# Altium PCB RGB_Matrix.PcbDoc
Units mm, origin at the board's own origin, x right, y up, seen from the top; angles counter-clockwise.
Board outline 152.4 x 101.6 mm, 2 copper layers (Top Layer, Bottom Layer); 83 components, 50 nets, 482 pads, 108 vias.
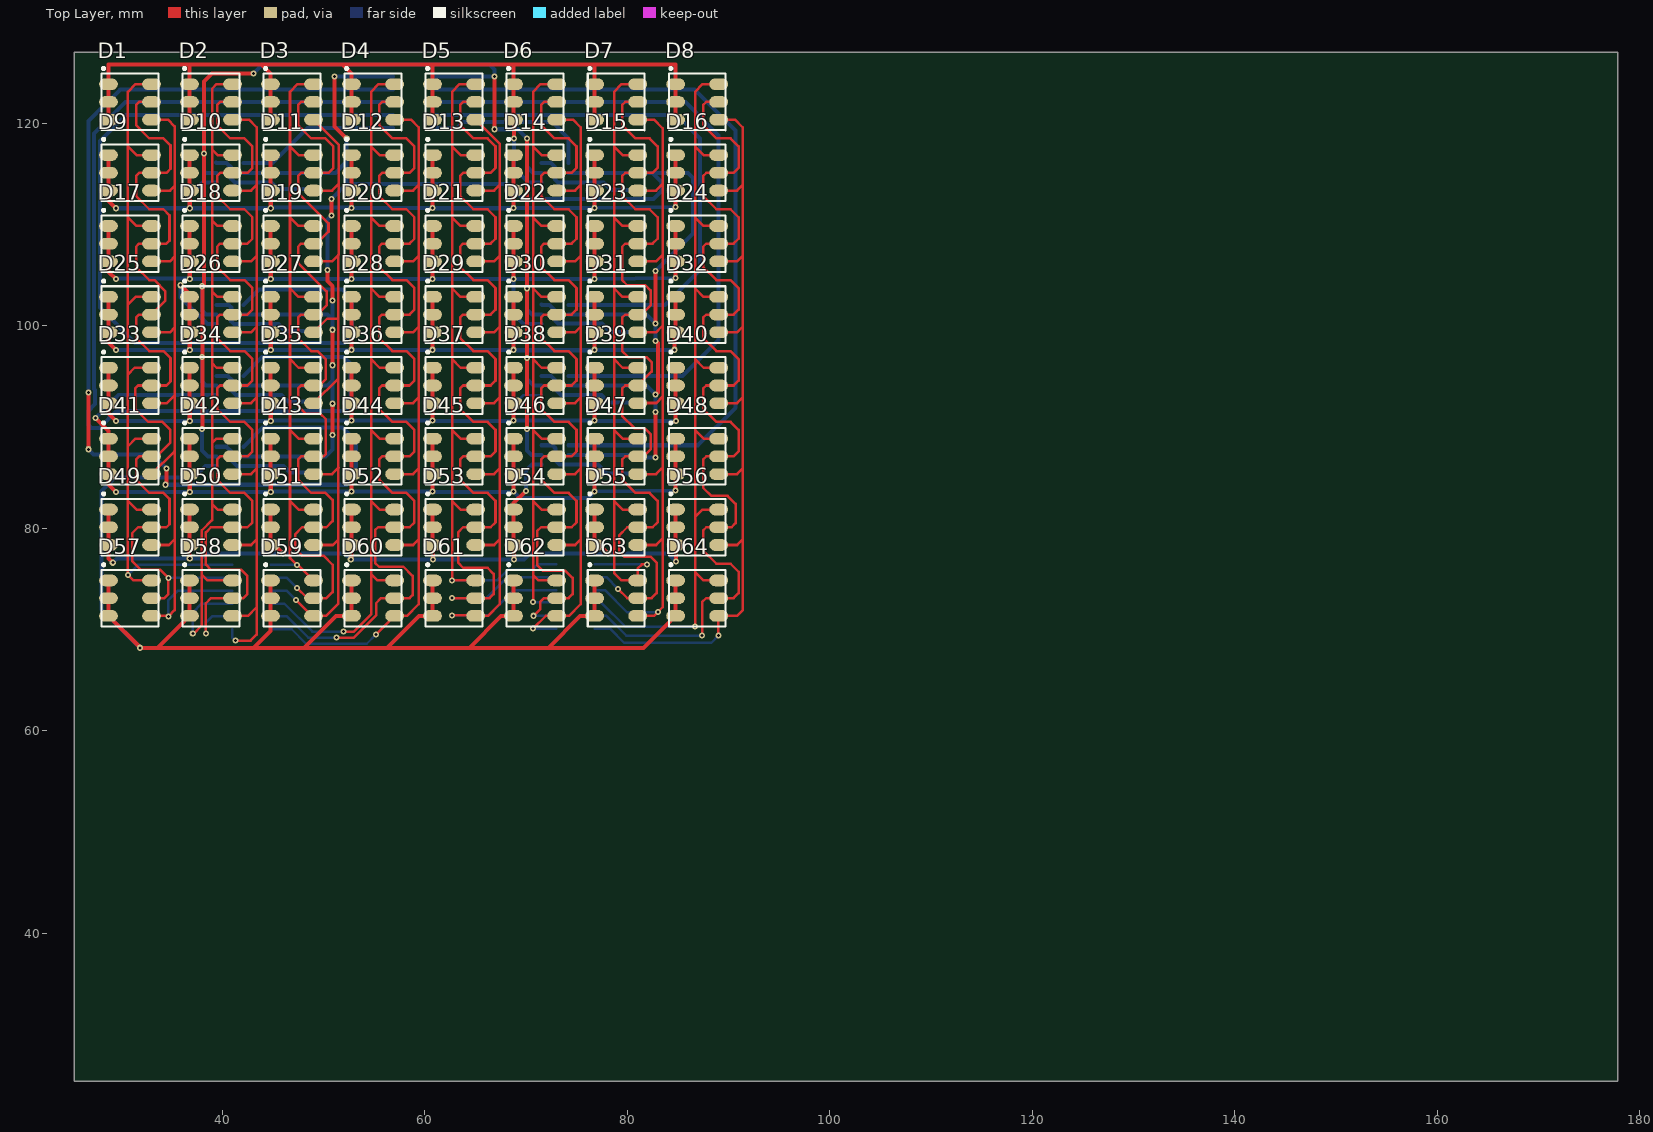
[diagram p0: Top Layer view]
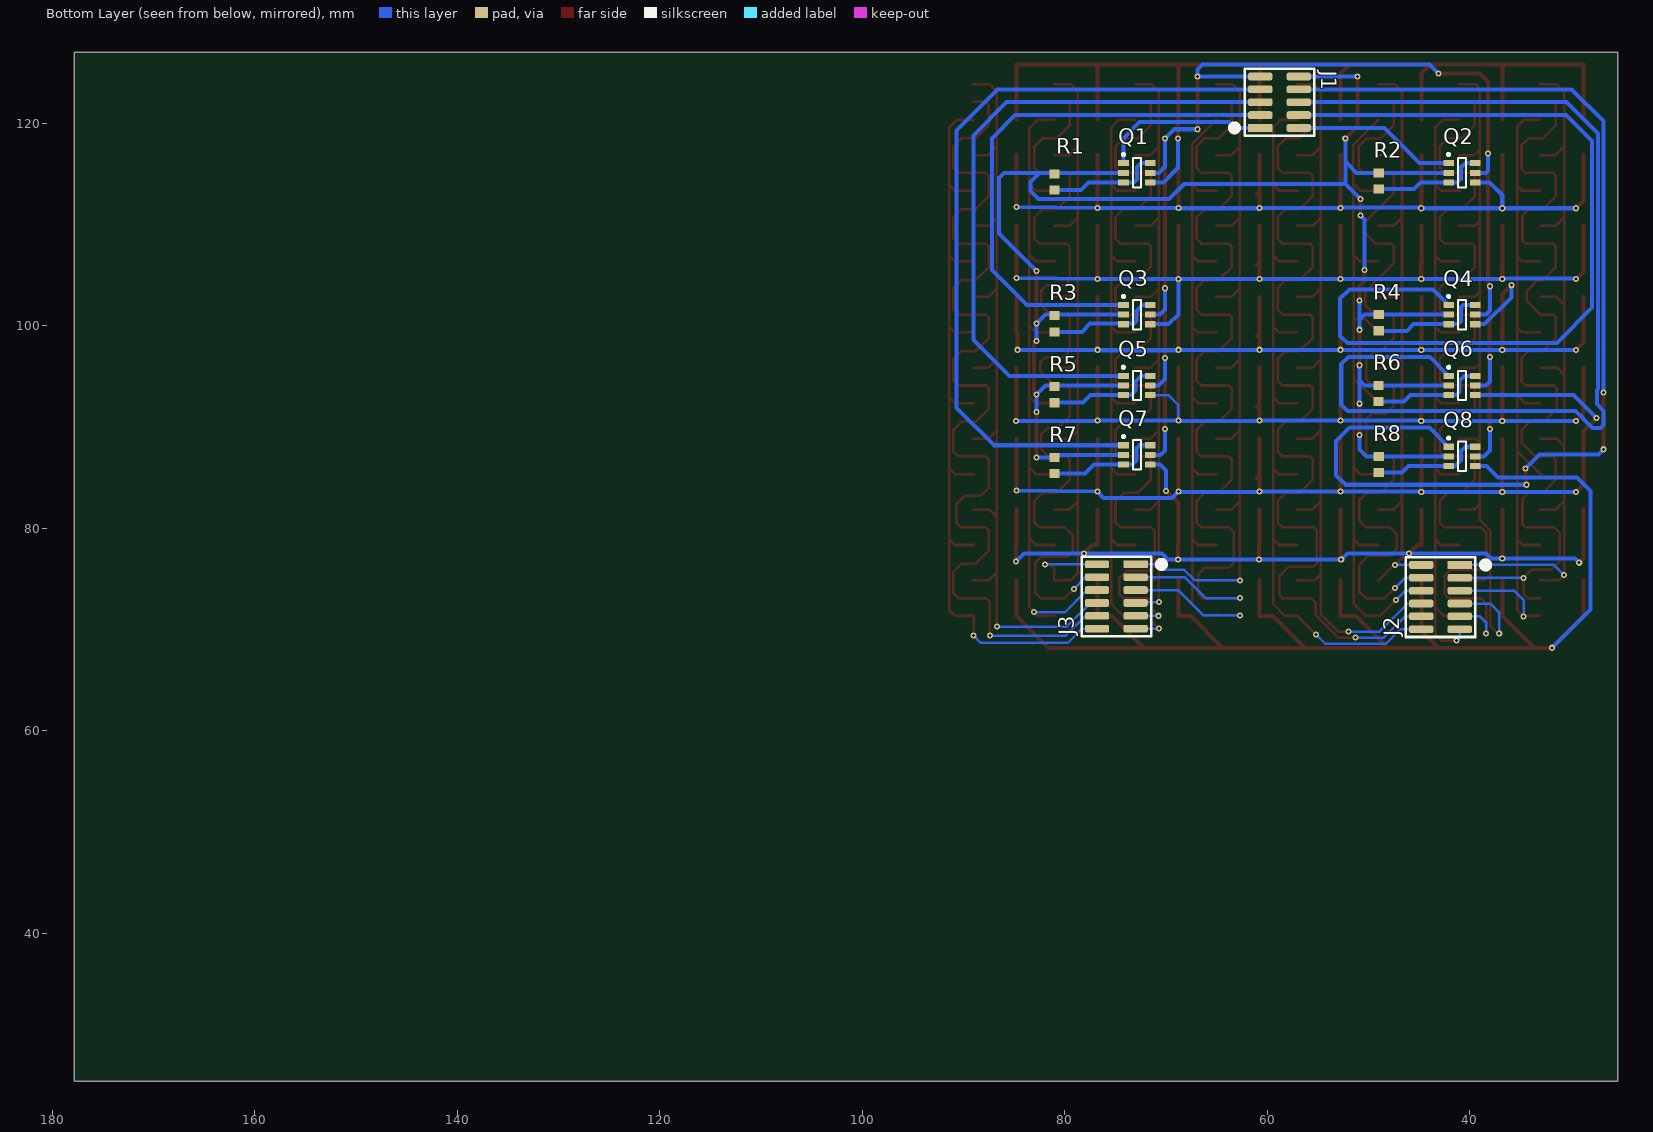
[diagram p1: Bottom Layer view, seen from below]
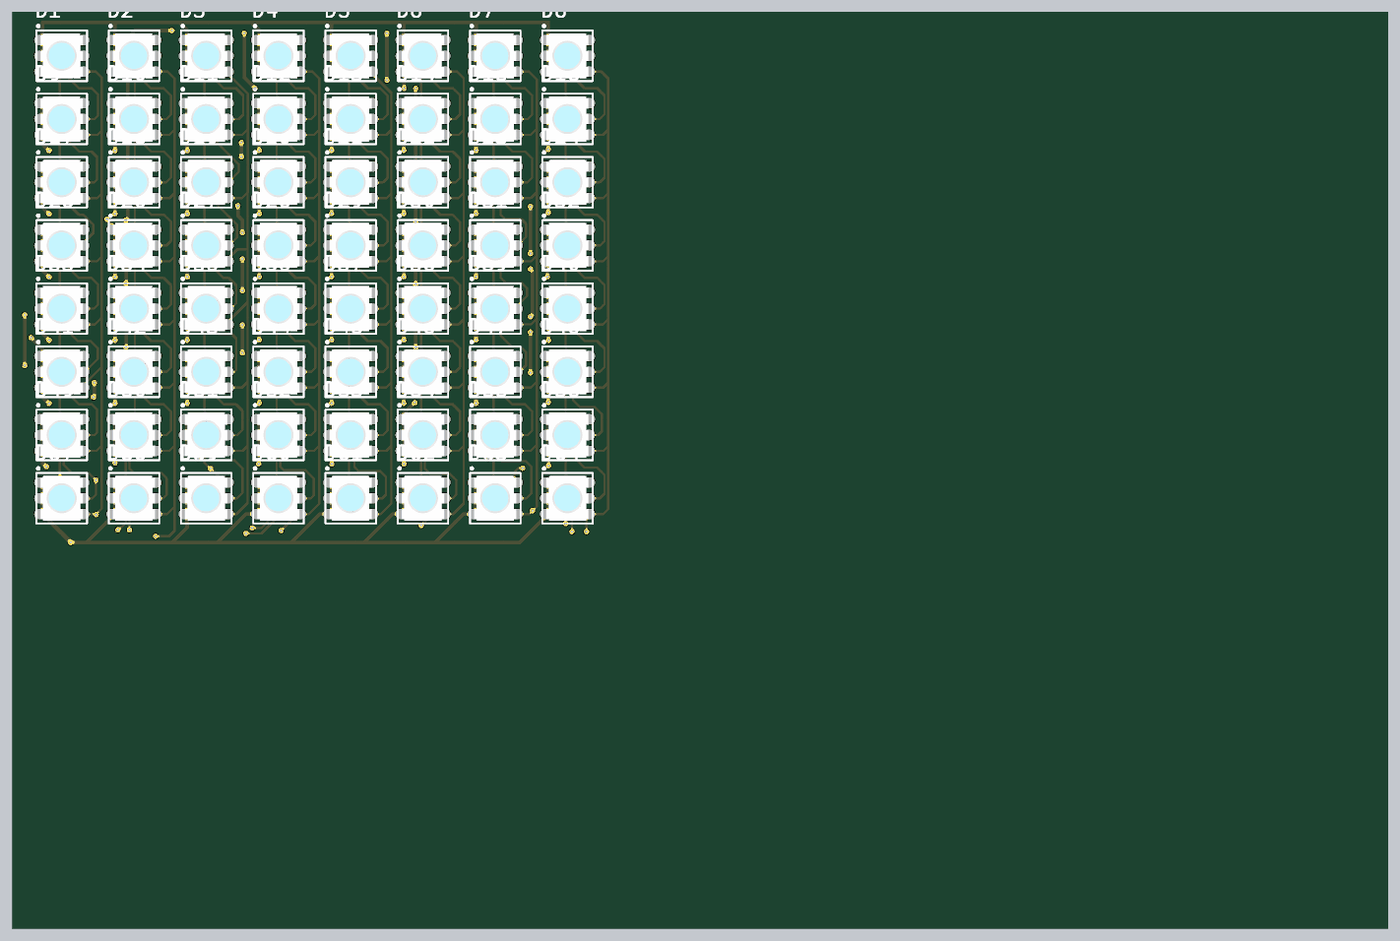
[diagram p2: 3D render of the assembled board from above, using the file's embedded part models]

## Layer stack, top to bottom
Top Solder: solder mask 0.0102, Solder Resist, Dk 3.5
Top Layer: signal copper 0.0356
Dielectric 1: dielectric 0.32, FR-4, Dk 4.8
Bottom Layer: signal copper 0.0356
Bottom Solder: solder mask 0.0102, Solder Resist, Dk 3.5

## Board outline
25.4,25.4 177.8,25.4 177.8,127 25.4,127

## Design rules (kind name [scope] priority, off if disabled: settings)
Clearance [All] p1: gap=0.16 ignorepadtopadclearanceinfootprint=FALSE except(0: Arc-Text Arc-Hole Track-Text Track-Hole SMDPad-Text SMDPad-Hole THPad-Text THPad-Hole Via-Text Via-Hole Fill-Text Fill-Hole Poly-Text Poly-Hole Region-Text Region-Hole Text-Text Text-Hole; 0.305: Via-Via Via-Fill Via-Poly Via-Region)
Height [All] p1: minheight=0 maxheight=200 prefheight=12.7
HoleSize [All] p1: absolutevalues=TRUE maxlimit=6.35 minlimit=0.3 maxpercent=80.000 minpercent=20.000
MinimumSolderMaskSliver [All] p1: minsoldermaskwidth=0.1
PlaneClearance [All] p1: clearance=1
PlaneConnect [All] p1: planeconnectstyle=Relief reliefexpansion=0.508 reliefentries=4 reliefconductorwidth=1 reliefairgap=0.254
PolygonConnect PolygonConnect_1 [IsVia] p1: connectstyle=Direct reliefconductorwidth=0.254 reliefentries=4 polygonreliefangle="90 Angle" airgapwidth=0.254
PolygonConnect [All] p2: connectstyle=Relief reliefconductorwidth=0.2 reliefentries=4 polygonreliefangle="90 Angle" airgapwidth=0.2
RoutingVias [All] p1: holewidth=0.3 width=0.6 viastyle="Through Hole" minholewidth=0.3 minwidth=0.6 maxholewidth=6.35 maxwidth=10 useviatemplates=TRUE viatemplateguid#1={2E2191CD-4772-4E32-9354-9200DD199FA9} viatemplatename#1=v60h30
SilkToSolderMaskClearance [IsPad] p1: minsilkscreentomaskgap=0.178 clearancetoexposedcopper=TRUE
SolderMaskExpansion [All] p1: expansion=0.102
Width [All] p1: maxlimit=10 minlimit=0.16 preferedwidth=0.4
24 further rules are at their usual default settings.

## Components (designator, comment, footprint, x,y, rotation, side; value= is the part's Value field where it differs from the comment)
D1 "LED_RGB" LED5050_RGB_N 30.9,122.1 r0 top
D2 "LED_RGB" LED5050_RGB_N 38.9,122.1 r0 top
D3 "LED_RGB" LED5050_RGB_N 46.9,122.1 r0 top
D4 "LED_RGB" LED5050_RGB_N 54.9,122.1 r0 top
D5 "LED_RGB" LED5050_RGB_N 62.9,122.1 r0 top
D6 "LED_RGB" LED5050_RGB_N 70.9,122.1 r0 top
D7 "LED_RGB" LED5050_RGB_N 78.9,122.1 r0 top
D8 "LED_RGB" LED5050_RGB_N 86.9,122.1 r0 top
D9 "LED_RGB" LED5050_RGB_N 30.9,115.1 r0 top
D10 "LED_RGB" LED5050_RGB_N 38.9,115.1 r0 top
D11 "LED_RGB" LED5050_RGB_N 46.9,115.1 r0 top
D12 "LED_RGB" LED5050_RGB_N 54.9,115.1 r0 top
D13 "LED_RGB" LED5050_RGB_N 62.9,115.1 r0 top
D14 "LED_RGB" LED5050_RGB_N 70.9,115.1 r0 top
D15 "LED_RGB" LED5050_RGB_N 78.9,115.1 r0 top
D16 "LED_RGB" LED5050_RGB_N 86.9,115.1 r0 top
D17 "LED_RGB" LED5050_RGB_N 30.9,108.1 r0 top
D18 "LED_RGB" LED5050_RGB_N 38.9,108.1 r0 top
D19 "LED_RGB" LED5050_RGB_N 46.9,108.1 r0 top
D20 "LED_RGB" LED5050_RGB_N 54.9,108.1 r0 top
D21 "LED_RGB" LED5050_RGB_N 62.9,108.1 r0 top
D22 "LED_RGB" LED5050_RGB_N 70.9,108.1 r0 top
D23 "LED_RGB" LED5050_RGB_N 78.9,108.1 r0 top
D24 "LED_RGB" LED5050_RGB_N 86.9,108.1 r0 top
D25 "LED_RGB" LED5050_RGB_N 30.9,101.1 r0 top
D26 "LED_RGB" LED5050_RGB_N 38.9,101.1 r0 top
D27 "LED_RGB" LED5050_RGB_N 46.9,101.1 r0 top
D28 "LED_RGB" LED5050_RGB_N 54.9,101.1 r0 top
D29 "LED_RGB" LED5050_RGB_N 62.9,101.1 r0 top
D30 "LED_RGB" LED5050_RGB_N 70.9,101.1 r0 top
D31 "LED_RGB" LED5050_RGB_N 78.9,101.1 r0 top
D32 "LED_RGB" LED5050_RGB_N 86.9,101.1 r0 top
D33 "LED_RGB" LED5050_RGB_N 30.9,94.1 r0 top
D34 "LED_RGB" LED5050_RGB_N 38.9,94.1 r0 top
D35 "LED_RGB" LED5050_RGB_N 46.9,94.1 r0 top
D36 "LED_RGB" LED5050_RGB_N 54.9,94.1 r0 top
D37 "LED_RGB" LED5050_RGB_N 62.9,94.1 r0 top
D38 "LED_RGB" LED5050_RGB_N 70.9,94.1 r0 top
D39 "LED_RGB" LED5050_RGB_N 78.9,94.1 r0 top
D40 "LED_RGB" LED5050_RGB_N 86.9,94.1 r0 top
D41 "LED_RGB" LED5050_RGB_N 30.9,87.1 r0 top
D42 "LED_RGB" LED5050_RGB_N 38.9,87.1 r0 top
D43 "LED_RGB" LED5050_RGB_N 46.9,87.1 r0 top
D44 "LED_RGB" LED5050_RGB_N 54.9,87.1 r0 top
D45 "LED_RGB" LED5050_RGB_N 62.9,87.1 r0 top
D46 "LED_RGB" LED5050_RGB_N 70.9,87.1 r0 top
D47 "LED_RGB" LED5050_RGB_N 78.9,87.1 r0 top
D48 "LED_RGB" LED5050_RGB_N 86.9,87.1 r0 top
D49 "LED_RGB" LED5050_RGB_N 30.9,80.1 r0 top
D50 "LED_RGB" LED5050_RGB_N 38.9,80.1 r0 top
D51 "LED_RGB" LED5050_RGB_N 46.9,80.1 r0 top
D52 "LED_RGB" LED5050_RGB_N 54.9,80.1 r0 top
D53 "LED_RGB" LED5050_RGB_N 62.9,80.1 r0 top
D54 "LED_RGB" LED5050_RGB_N 70.9,80.1 r0 top
D55 "LED_RGB" LED5050_RGB_N 78.9,80.1 r0 top
D56 "LED_RGB" LED5050_RGB_N 86.9,80.1 r0 top
D57 "LED_RGB" LED5050_RGB_N 30.9,73.1 r0 top
D58 "LED_RGB" LED5050_RGB_N 38.9,73.1 r0 top
D59 "LED_RGB" LED5050_RGB_N 46.9,73.1 r0 top
D60 "LED_RGB" LED5050_RGB_N 54.9,73.1 r0 top
D61 "LED_RGB" LED5050_RGB_N 62.9,73.1 r0 top
D62 "LED_RGB" LED5050_RGB_N 70.9,73.1 r0 top
D63 "LED_RGB" LED5050_RGB_N 78.9,73.1 r0 top
D64 "LED_RGB" LED5050_RGB_N 86.9,73.1 r0 top
J1 "2x5 SMD HEADER" "2x5 SMD HEADER" 60.7,119.53 r180 bottom
J2 "2x6 SMD HEADER" "2x6 SMD HEADER" 40.99,76.38 r0 bottom
J3 "2x6 SMD HEADER" "2x6 SMD HEADER" 73,76.44 r0 bottom
Q1 "QS6M3TR" QS6M3TR 72.875,115.1 r180 bottom
Q2 "QS6M3TR" QS6M3TR 40.775,115.1 r180 bottom
Q3 "QS6M3TR" QS6M3TR 72.875,101.1 r180 bottom
Q4 "QS6M3TR" QS6M3TR 40.775,101.1 r180 bottom
Q5 "QS6M3TR" QS6M3TR 72.875,94.1 r180 bottom
Q6 "QS6M3TR" QS6M3TR 40.775,94.1 r180 bottom
Q7 "QS6M3TR" QS6M3TR 72.875,87.25 r180 bottom
Q8 "QS6M3TR" QS6M3TR 40.775,87.1 r180 bottom
R1 "10k" RESC0603(1608)_N 81,114.2 r90 bottom
R2 "10k" RESC0603(1608)_N 49,114.3 r90 bottom
R3 "10k" RESC0603(1608)_N 81,100.2 r90 bottom
R4 "10k" RESC0603(1608)_N 49,100.3 r90 bottom
R5 "10k" RESC0603(1608)_N 81,93.2 r90 bottom
R6 "10k" RESC0603(1608)_N 49.025,93.3 r90 bottom
R7 "10k" RESC0603(1608)_N 81,86.2 r90 bottom
R8 "10k" RESC0603(1608)_N 49,86.3 r90 bottom

## Footprints (in the part's own frame and the unit in brackets; to place one, negate y for a bottom-side part, rotate by r counter-clockwise, add the part's x,y. Pads: shape width x height; smd on the part's side, far side on the other; paste and mask are expansions set on the pad)
"2x5 SMD HEADER" [mm]
  rect 2.4x0.76 smd: 1(0,0)
  rrect50% 2.4x0.76 smd: 2(3.81,0) 3(0,1.27) 4(3.81,1.27) 5(0,2.54) 6(3.81,2.54) 7(0,3.81) 8(3.81,3.81) 9(0,5.08) 10(3.81,5.08)
  silkscreen extent -2.68,-0.76 5.33,5.84
"2x6 SMD HEADER" [mm]
  rect 2.4x0.76 smd: 1(0,0)
  rrect50% 2.4x0.76 smd: 2(3.81,0) 3(0,1.27) 4(3.81,1.27) 5(0,2.54) 6(3.81,2.54) 7(0,3.81) 8(3.81,3.81) 9(0,5.08) 10(3.81,5.08) 11(0,6.35) 12(3.81,6.35)
  silkscreen extent -2.68,-0.76 5.33,7.11
LED5050_RGB_N [mm] "RGB LED SMD 5050, individual color channels, normal density"
  oval 1.85x1.15 smd: 1(-2.125,1.75) 2(-2.125,0) 3(-2.125,-1.75) 4(2.125,-1.75) 5(2.125,0) 6(2.125,1.75)
  silkscreen extent -2.8,-2.8 2.8,3.42, body extent -2.37,-2.49 2.36,2.49, height 2.07
QS6M3TR [mm] "SOT23, 6-Leads, Body 2.90x2.80mm, Pitch 0.95mm, IPC Medium Density"
  rect 1.05x0.6 smd: 1(-1.325,0.95) 2(-1.325,0) 3(-1.325,-0.95) 4(1.325,-0.95) 5(1.325,0) 6(1.325,0.95)
  silkscreen extent -1.45,-1.45 0.4,1.92, body extent -1.4,-1.45 1.4,1.45, height 1
RESC0603(1608)_N [mm] "Chip Resistor, Body 1.6x0.8mm, IPC Medium Density"
  rect 0.9x1 smd: 1(-0.8,0) 2(0.8,0)
  body extent -0.85,-0.47 0.85,0.47, height 0.6

## Part data
D1 D2 D3 D4 D5 D6 D7 D8 D9 D10 D11 D12 D13 D14 D15 D16 D17 D18 D19 D20 D21 D22 D23 D24 D25 D26 D27 D28 D29 D30 D31 D32 D33 D34 D35 D36 D37 D38 D39 D40 D41 D42 D43 D44 D45 D46 D47 D48 D49 D50 D51 D52 D53 D54 D55 D56 D57 D58 D59 D60 D61 D62 D63 D64: library part 3348, "LED RGB, independent colors", antall=300, beskrivelse=SMD, dybde=0, hylle=6, id=3348, kolonne=0, lager_type=Fremlager, navn="LED RGB", pakke_opprettet="12/17/2015 2:22:54 AM", pakke_opprettet_av=924, pakketype=SMD, pris=1, rad=7, rom=OV, symbol_opprettet="12/17/2015 2:22:13 AM", symbol_opprettet_av=924
R1 R2 R3 R4 R5 R6 R7 R8: library part 2444, "0.1W 1% Thick film resistor", antall=90, dybde=72, hylle=6, id=2444, kolonne=0, lager_type=Fremlager, leverandor=Farnell, leverandor_varenr=2447230, navn=10k, nokkelord="Resistor Motstand", pakke_opprettet="08-Jul-14 9:15:30 PM", pakke_opprettet_av=815, pakketype=0603, pris=0, produsent=Multikomp, rad=-1, rom=OV, symbol_opprettet="08-Jul-14 9:16:33 PM", symbol_opprettet_av=815

## Via types
v1: diameter 0.6, hole 0.3, Top Layer to Bottom Layer, 108 vias

## Nets (pads, with @x,y where several pads share a name; then routed paths per layer and width w, separated by ;. In a path a pad name is that pad's centre, name@x,y a point inside that pad or via, vN(x,y) a via of type N, cw(c..) or ccw(c..) an arc to the next point about the centre after c; other vN are vias at no path point)
GND: J1.9 Q1.5 Q2.5 Q3.5 Q4.5 Q5.5 Q6.5 Q7.5 Q8.5 | length 138.9
  Top Layer w0.4: v1(38,89.8) 38.06,89.86 38.06,96.84 v1(38,96.9) 38.06,96.96 38.06,103.84 v1(38,103.9) 38.2,104.1 v1(38.2,117) 38.2,124.1 39,124.9 v1(43.1,124.9) ; v1(66.9,119.4) v1(66.9,124.6) ; v1(70.1,89.8) v1(70.1,96.8) v1(70.1,103.7) v1(70.1,118.5)
  Bottom Layer w0.4: v1(38,89.8) 38,87.7 38.6,87.1 Q8.5 ; v1(38,96.9) 38,94.5 38.4,94.1 Q6.5 ; v1(38,103.9) 38,101.5 38.4,101.1 Q4.5 ; v1(38.2,117) 38.2,115.3 38.4,115.1 Q2.5 ; v1(43.1,124.9) 44,125.8 66.4,125.8 66.9,125.3 v1(66.9,124.6) 60.71,124.6 J1.9 ; v1(66.9,119.4) 69.2,119.4 v1(70.1,118.5) 70.1,115.7 70.7,115.1 Q1.5 ; v1(70.1,89.8) 70.1,87.7 70.55,87.25 Q7.5 ; 70.1,94.75 70.75,94.1 Q5.5 ; 70.1,94.9 v1(70.1,96.8) ; v1(70.1,103.7) 70.1,101.6 70.6,101.1 Q3.5
LEDS.BLUE_1: D1.4 D9.4 D17.4 D25.4 D33.4 D41.4 D49.4 D57.4 J2.5 | length 78.8
  Top Layer w0.25: D41.4@32.925,85.35 D41.4 35.275,87.6 ; D57.4 34.55,71.35 34.7,71.2 v1(34.7,71.3) 35.315,71.915 35.315,78.915 ; D49.4 34.75,78.35 35.315,78.915 ; D33.4 34.55,92.35 35.315,93.115 ; D17.4 34.65,106.35 34.85,106.35 35.315,106.815 ; D9.4 34.85,113.35 35.315,113.815 ; D1.4 34.65,120.35 35.315,119.685 35.315,113.815 ; 34.65,99.35 34.85,99.35 35.315,99.815 ; 34.65,99.35 D25.4 34.65,99.35 ; 35.315,78.915 35.315,93.115 ; 35.315,93.115 35.315,99.815 ; 35.315,99.815 35.315,106.815 ; 35.315,106.815 35.315,113.815
  Bottom Layer w0.25: v1(34.7,71.3) 34.7,72.9 35.64,73.84 J2.5
LEDS.BLUE_2: D2.4 D10.4 D18.4 D26.4 D34.4 D42.4 D50.4 D58.4 J2.11 | length 79.6
  Top Layer w0.25: D58.4 42.55,71.35 43.4,72.2 ; D50.4 42.85,78.35 43.4,78.9 ; D34.4 42.85,92.35 43.4,92.9 ; D18.4 42.85,106.35 43.4,106.9 ; D2.4 42.65,120.35 43.4,119.6 43.4,113.9 ; v1(41.3,68.9) 42.8,68.9 43.4,69.5 43.4,72.2 ; 42.65,85.35 42.85,85.35 43.4,85.9 ; 42.65,85.35 D42.4 42.65,85.35 ; 42.65,99.35 42.85,99.35 43.4,99.9 ; 42.65,99.35 D26.4 42.65,99.35 ; 42.65,113.35 42.85,113.35 43.4,113.9 ; 42.65,113.35 D10.4 42.65,113.35 ; 43.4,72.2 43.4,78.9 ; 43.4,78.9 43.4,85.9 ; 43.4,85.9 43.4,92.9 ; 43.4,92.9 43.4,99.9 ; 43.4,99.9 43.4,106.9 ; 43.4,106.9 43.4,113.9
  Bottom Layer w0.25: J2.11 40.99,69.21 v1(41.3,68.9)
LEDS.BLUE_3: D3.4 D11.4 D19.4 D27.4 D35.4 D43.4 D51.4 D59.4 J2.6 | length 74.4
  Top Layer w0.25: v1(47.3,72.9) 48.85,71.35 D59.4 50.25,71.35 51.485,72.585 51.485,78.9 ; D51.4 50.935,78.35 51.485,78.9 ; D43.4 50.65,85.35 50.85,85.35 51.485,85.985 ; D35.4 51.485,94.81 ; D27.4 50.365,100.69 51.485,100.69 51.485,94.81 ; D19.4 50.65,106.35 50.85,106.35 51.485,106.985 ; D11.4 50.85,113.35 51.5,114 ; D3.4 51.5,117.875 51.5,114 ; 51.485,100.7 51.485,106.985 ; 51.493,85.993 51.485,85.985 ; 51.485,78.9 51.485,85.985 ; 51.485,85.985 51.485,94.81 ; 51.485,106.985 51.5,107 51.5,114
  Bottom Layer w0.25: J2.6 46.36,73.84 v1(47.3,72.9)
LEDS.BLUE_4: D4.4 D12.4 D20.4 D28.4 D36.4 D44.4 D52.4 D60.4 J2.12 | length 82.2
  Top Layer w0.25: v1(55.188,69.512) D60.4 58.25,71.35 59.4,72.5 59.4,78.9 ; D52.4 58.85,78.35 59.4,78.9 ; D44.4 58.65,85.35 58.85,85.35 59.4,85.9 ; D36.4 58.65,92.35 58.85,92.35 59.4,92.9 ; D28.4 58.85,99.35 59.4,99.9 ; D20.4 58.65,106.35 58.85,106.35 59.4,106.9 ; D12.4 58.85,113.35 59.4,113.9 ; D4.4 58.65,120.35 59.4,119.6 59.4,113.9 ; 59.4,78.9 59.4,85.9 ; 59.4,85.9 59.4,92.9 ; 59.4,92.9 59.4,99.9 ; 59.4,99.9 59.4,106.9 ; 59.4,106.9 59.4,113.9
  Bottom Layer w0.25: J2.12 46.87,70.03 48.3,68.6 54.275,68.6 v1(55.188,69.512)
LEDS.BLUE_5: D5.4 D13.4 D21.4 D29.4 D37.4 D45.4 D53.4 D61.4 J3.5 | length 81.1
  Top Layer w0.25: v1(62.7,71.4) 64.775,71.4 64.875,71.5 D61.4 66.25,71.35 67.4,72.5 67.4,78.9 ; D53.4 66.85,78.35 67.4,78.9 ; D45.4 66.65,85.35 66.85,85.35 67.4,85.9 ; D37.4 66.85,92.35 67.4,92.9 ; D29.4 66.85,99.35 67.4,99.9 ; D21.4 66.65,106.35 66.85,106.35 67.4,106.9 ; D13.4 66.85,113.35 67.4,113.9 ; D5.4 67.4,117.975 67.4,113.9 ; 67.4,78.9 67.4,84.6 67.4,85.9 ; 67.4,85.9 67.4,92.9 ; 67.4,92.9 67.4,99.9 ; 67.4,99.9 67.4,106.9 ; 67.4,106.9 67.4,113.9
  Bottom Layer w0.25: v1(62.7,71.4) 66.3,71.4 68.8,73.9 J3.5
LEDS.BLUE_6: D6.4 D14.4 D22.4 D30.4 D38.4 D46.4 D54.4 D62.4 J3.11 | length 73.4
  Top Layer w0.25: v1(70.69,70.09) 71.95,71.35 D62.4 74.25,71.35 75.4,72.5 75.4,78.9 ; D54.4 74.85,78.35 75.4,78.9 ; D46.4 74.65,85.35 74.85,85.35 75.4,85.9 ; D38.4 74.85,92.35 75.4,92.9 ; D30.4 74.85,99.35 75.4,99.9 ; D22.4 74.65,106.35 74.85,106.35 75.4,106.9 ; D14.4 74.85,113.35 75.4,113.9 ; D6.4 74.65,120.35 75.4,119.6 75.4,113.9 ; 75.4,78.9 75.4,84.6 75.4,85.9 ; 75.4,85.9 75.4,92.9 ; 75.4,92.9 75.4,99.9 ; 75.4,99.9 75.4,106.9 ; 75.4,106.9 75.4,113.9
  Bottom Layer w0.25: v1(70.69,70.09) J3.11
LEDS.BLUE_7: D7.4 D15.4 D23.4 D31.4 D39.4 D47.4 D55.4 D63.4 J3.6 | length 76.1
  Top Layer w0.25: D63.4 82.65,71.35 v1(83.025,71.725) 83.5,72.2 83.5,79 ; D55.4 82.85,78.35 83.5,79 ; D47.4 82.65,85.35 82.85,85.35 83.4,85.9 ; D39.4 81.045,92.37 82.87,92.37 83.5,93 ; D31.4 82.85,99.35 83.4,99.9 ; D23.4 82.65,106.35 82.85,106.35 83.4,106.9 ; D15.4 82.85,113.35 83.5,114 ; D7.4 82.65,120.35 83.5,119.5 83.5,114 ; 83.5,79 83.5,93 ; 83.5,93 83.5,114
  Bottom Layer w0.25: J3.6 77.8,73.9 80,71.7 83,71.7 v1(83.025,71.725)
LEDS.BLUE_8: D8.4 D16.4 D24.4 D32.4 D40.4 D48.4 D56.4 D64.4 J3.12 | length 83.6
  Top Layer w0.25: v1(89,69.4) 89,71.325 D64.4 90.85,71.35 91.4,71.9 91.4,78.9 ; D56.4 90.85,78.35 91.4,78.9 ; D48.4 90.65,85.35 90.85,85.35 91.4,85.9 ; D40.4 90.65,92.35 90.85,92.35 91.4,92.9 ; D32.4 90.85,99.35 91.4,99.9 ; D24.4 90.65,106.35 90.85,106.35 91.4,106.9 ; D16.4 90.85,113.35 91.4,113.9 ; D8.4 90.65,120.35 91.4,119.6 91.4,113.9 ; 91.4,78.9 91.4,85.9 ; 91.4,85.9 91.4,92.9 ; 91.4,92.9 91.4,99.9 ; 91.4,99.9 91.4,106.9 ; 91.4,106.9 91.4,113.9
  Bottom Layer w0.25: J3.12 78.31,70.09 79.7,68.7 88.3,68.7 v1(89,69.4)
LEDS.GREEN_1: D1.5 D9.5 D17.5 D25.5 D33.5 D41.5 D49.5 D57.5 J2.3 | length 89.8
  Top Layer w0.25: D41.5@32.925,87.1 33.5,87.1 34.89,88.49 34.89,89.71 34.1,90.5 32.7,90.5 31.4,91.8 31.4,93.8 31.7,94.1 D33.5@32.925,94.1 ; D57.5 34.3,73.1 34.7,73.5 34.7,75.1 v1(34.69,75.11) 33.9,75.9 32,75.9 31.11,76.79 31.11,79.51 31.7,80.1 D49.5 34.5,80.1 34.8,80.4 34.8,82.9 34.2,83.5 32.8,83.5 31.5,84.8 31.5,86.8 31.8,87.1 D41.5 ; D33.5 34.5,94.1 34.9,94.5 34.9,96.8 34.2,97.5 32.8,97.5 31.5,98.8 31.5,100.8 31.8,101.1 D25.5 34.4,102.475 34.4,103.4 33.3,104.5 32.8,104.5 31.5,105.8 31.5,107.8 31.8,108.1 D17.5 34.5,108.1 34.8,108.4 34.8,110.9 34.2,111.5 32.8,111.5 31.5,112.8 31.5,114.8 31.8,115.1 34.5,115.1 34.9,115.5 34.9,117.8 34.2,118.5 32.8,118.5 31.5,119.8 31.5,121.8 31.8,122.1 D1.5
  Bottom Layer w0.25: v1(34.69,75.11) J2.3
LEDS.GREEN_2: D2.5 D10.5 D18.5 D26.5 D34.5 D42.5 D50.5 D58.5 J2.9 | length 97.6
  Top Layer w0.25: v1(38.4,69.6) 38.4,72.6 38.9,73.1 D58.5 42.1,73.1 42.5,73.5 42.5,75.3 41.9,75.9 38.9,75.9 38.395,76.405 38.395,79.595 38.9,80.1 D50.5 42.5,80.1 42.99,80.59 42.99,82.71 42.2,83.5 40.8,83.5 39.5,84.8 39.5,86.8 39.8,87.1 D42.5 42.5,87.1 42.99,87.59 42.99,89.71 42.2,90.5 40.8,90.5 39.5,91.8 39.5,93.8 39.8,94.1 D34.5 42.5,94.1 42.99,94.59 42.99,96.71 42.2,97.5 40.8,97.5 39.5,98.8 39.5,100.8 39.8,101.1 D26.5 42.5,101.1 42.99,101.59 42.99,103.71 42.2,104.5 40.8,104.5 39.5,105.8 39.5,107.8 39.8,108.1 D18.5 42.5,108.1 42.99,108.59 42.99,110.71 42.2,111.5 40.8,111.5 39.5,112.8 39.5,114.8 39.8,115.1 D10.5 42.5,115.1 42.99,115.59 42.99,117.71 42.2,118.5 40.8,118.5 39.5,119.8 39.5,121.8 39.8,122.1 D2.5
  Bottom Layer w0.25: v1(38.4,69.6) 38.4,70.7 39,71.3 J2.9
LEDS.GREEN_3: D3.5 D11.5 D19.5 D27.5 D35.5 D43.5 D51.5 D59.5 J2.4 | length 84.8
  Top Layer w0.25: v1(47.4,74.1) 48.4,73.1 D59.5 50.3,73.1 50.9,73.7 50.9,76.4 50,77.3 47.9,77.3 47.2,78 47.2,79.4 47.9,80.1 D51.5 50.3,80.1 50.9,80.7 50.9,82.8 50.2,83.5 48.8,83.5 47.5,84.8 47.5,86.8 47.8,87.1 D43.5 50,87.1 50.235,87.335 50.235,90.765 49.7,91.3 48.3,91.3 47.5,92.1 47.5,93.8 47.8,94.1 D35.5 49.6,94.1 50.235,94.735 50.235,96.665 49.4,97.5 48.8,97.5 47.5,98.8 47.5,100.8 47.8,101.1 49.4,101.1 50.315,102.015 50.315,103.385 47.5,106.2 47.5,107.8 47.8,108.1 D19.5 49.3,108.1 50.5,109.3 50.5,110.1 47.5,113.1 47.5,114.8 47.8,115.1 50.5,115.1 50.99,115.59 50.99,117.71 50.2,118.5 48.8,118.5 47.5,119.8 47.5,121.8 47.8,122.1 D3.5
  Bottom Layer w0.25: J2.4 46.39,75.11 v1(47.4,74.1)
LEDS.GREEN_4: D4.5 D12.5 D20.5 D28.5 D36.5 D44.5 D52.5 D60.5 J2.10 | length 102.4
  Top Layer w0.25: v1(51.3,69.2) 53,69.2 55.2,71.4 55.2,72.6 55.7,73.1 D60.5 58.5,73.1 58.8,73.4 58.8,75.3 57.9,76.2 55.5,76.2 55.11,76.59 55.11,79.81 55.4,80.1 D52.5 58.5,80.1 58.99,80.59 58.99,82.71 58.2,83.5 56.8,83.5 55.5,84.8 55.5,86.8 55.8,87.1 D44.5 58.5,87.1 58.99,87.59 58.99,89.71 58.2,90.5 56.8,90.5 55.5,91.8 55.5,93.8 55.8,94.1 D36.5 58.5,94.1 58.99,94.59 58.99,96.71 58.2,97.5 56.8,97.5 55.5,98.8 55.5,100.8 55.8,101.1 58.5,101.1 58.99,101.59 58.99,103.71 58.2,104.5 56.8,104.5 55.5,105.8 55.5,107.8 55.8,108.1 D20.5 58.5,108.1 58.99,108.59 58.99,110.71 58.2,111.5 56.8,111.5 55.5,112.8 55.5,114.8 55.8,115.1 D12.5 58.5,115.1 58.99,115.59 58.99,117.71 58.2,118.5 56.8,118.5 55.5,119.8 55.5,121.8 55.8,122.1 D4.5
  Bottom Layer w0.25: J2.10 46.4,71.3 48.5,69.2 v1(51.3,69.2)
LEDS.GREEN_5: D5.5 D13.5 D21.5 D29.5 D37.5 D45.5 D53.5 D61.5 J3.3 | length 100.1
  Top Layer w0.25: v1(62.7,73.1) D61.5 66.4,73.1 66.8,73.5 66.8,75.5 66.2,76.1 63.8,76.1 63.3,76.6 63.3,79.6 63.8,80.1 D53.5 66.5,80.1 66.99,80.59 66.99,82.71 66.2,83.5 64.8,83.5 63.5,84.8 63.5,86.8 63.8,87.1 D45.5 66.5,87.1 66.99,87.59 66.99,89.71 66.2,90.5 64.8,90.5 63.5,91.8 63.5,93.8 63.8,94.1 D37.5 66.5,94.1 66.99,94.59 66.99,96.71 66.2,97.5 64.8,97.5 63.5,98.8 63.5,100.8 63.8,101.1 66.5,101.1 66.99,101.59 66.99,103.71 66.2,104.5 64.8,104.5 63.5,105.8 63.5,107.8 63.8,108.1 D21.5 66.5,108.1 66.99,108.59 66.99,110.71 66.2,111.5 64.8,111.5 63.5,112.8 63.5,114.8 63.8,115.1 D13.5 66.5,115.1 66.99,115.59 66.99,117.71 66.2,118.5 64.8,118.5 63.5,119.8 63.5,121.8 63.8,122.1 D5.5
  Bottom Layer w0.25: v1(62.7,73.1) 66.1,73.1 68.17,75.17 J3.3
LEDS.GREEN_6: D6.5 D14.5 D22.5 D30.5 D38.5 D46.5 D54.5 D62.5 J3.9 | length 92.2
  Top Layer w0.25: v1(70.76,71.36) 71.4,72 71.4,72.7 71.8,73.1 D62.5 74.2,73.1 74.6,73.5 74.6,75.1 73.9,75.8 71.7,75.8 71.11,76.39 71.11,79.71 71.5,80.1 D54.5 74.5,80.1 74.99,80.59 74.99,82.71 74.2,83.5 72.8,83.5 71.5,84.8 71.5,86.8 71.8,87.1 D46.5 74.5,87.1 74.99,87.59 74.99,89.71 74.2,90.5 72.8,90.5 71.5,91.8 71.5,93.8 71.8,94.1 D38.5 74.5,94.1 74.99,94.59 74.99,96.71 74.2,97.5 72.8,97.5 71.5,98.8 71.5,100.8 71.8,101.1 74.5,101.1 74.99,101.59 74.99,103.71 74.2,104.5 72.8,104.5 71.5,105.8 71.5,107.8 71.8,108.1 D22.5 74.5,108.1 74.99,108.59 74.99,110.71 74.2,111.5 72.8,111.5 71.5,112.8 71.5,114.8 71.8,115.1 D14.5 74.5,115.1 74.99,115.59 74.99,117.71 74.2,118.5 72.8,118.5 71.5,119.8 71.5,121.8 71.8,122.1 D6.5
  Bottom Layer w0.25: v1(70.76,71.36) J3.9
LEDS.GREEN_7: D7.5 D15.5 D23.5 D31.5 D39.5 D47.5 D55.5 D63.5 J3.4 | length 88.4
  Top Layer w0.25: v1(79.1,74) 80,73.1 D63.5 82.4,73.1 82.9,73.6 82.9,76.6 82.3,77.2 79.7,77.2 79.2,77.7 79.2,79.3 80,80.1 D55.5 82.5,80.1 82.99,80.59 82.99,82.71 82.2,83.5 80.8,83.5 79.5,84.8 79.5,86.8 79.8,87.1 D47.5 81.6,87.1 82.3,87.8 82.3,89.3 81.7,89.9 80.7,89.9 79.5,91.1 79.5,93.8 79.8,94.1 D39.5 82.4,95.475 82.4,96.4 81.9,96.9 80.1,96.9 79.5,97.5 79.5,100.8 79.8,101.1 D31.5 81.4,101.1 82.3,102 82.3,103.5 81.8,104 80,104 79.5,104.5 79.5,107.8 79.8,108.1 D23.5 82.5,108.1 82.99,108.59 82.99,110.71 82.2,111.5 80.8,111.5 79.5,112.8 79.5,114.8 79.8,115.1 82.5,115.1 82.99,115.59 82.99,117.71 82.2,118.5 80.8,118.5 79.5,119.8 79.5,121.8 79.8,122.1 D7.5
  Bottom Layer w0.25: J3.4 77.93,75.17 v1(79.1,74)
LEDS.GREEN_8: D8.5 D16.5 D24.5 D32.5 D40.5 D48.5 D56.5 D64.5 J3.10 | length 102.3
  Top Layer w0.25: v1(87.4,69.4) 87.4,72.7 87.8,73.1 90.5,73.1 90.99,73.59 90.99,75.71 90.2,76.5 88.8,76.5 87.5,77.8 87.5,79.8 87.8,80.1 D56.5 90.3,80.1 90.7,80.5 90.7,82.4 89.9,83.2 88.3,83.2 87.5,84 87.5,86.8 87.8,87.1 D48.5 90.5,87.1 90.99,87.59 90.99,89.71 90.2,90.5 88.8,90.5 87.5,91.8 87.5,93.8 87.8,94.1 D40.5 90.5,94.1 90.99,94.59 90.99,96.71 90.2,97.5 88.8,97.5 87.5,98.8 87.5,100.8 87.8,101.1 90.5,101.1 90.99,101.59 90.99,103.71 90.2,104.5 88.8,104.5 87.5,105.8 87.5,107.8 87.8,108.1 D24.5 90.5,108.1 90.99,108.59 90.99,110.71 90.2,111.5 88.8,111.5 87.5,112.8 87.5,114.8 87.8,115.1 90.5,115.1 90.99,115.59 90.99,117.71 90.2,118.5 88.8,118.5 87.5,119.8 87.5,121.8 87.8,122.1 D8.5
  Bottom Layer w0.25: J3.10 77.94,71.36 79.9,69.4 v1(87.4,69.4)
LEDS.RED_1: D1.6 D9.6 D17.6 D25.6 D33.6 D41.6 D49.6 D57.6 J2.1 | length 82.3
  Top Layer w0.25: v1(30.7,75.4) 31.25,74.85 D57.6 ; v1@30.7,75.5 30.7,82.7 ; D41.6@32.925,88.85 31.45,88.85 ; D49.6 31.55,81.85 30.7,82.7 ; D41.6 31.45,88.85 ; D33.6 31.35,95.85 30.7,95.2 ; D17.6 31.55,109.85 30.7,110.7 ; D9.6 31.55,116.85 30.7,117.7 ; D1.6 31.45,123.85 30.7,123.1 30.7,117.7 ; 30.7,82.7 30.7,88.1 ; 30.7,88.1 30.7,95.2 ; 30.7,88.1 31.45,88.85 ; 30.7,95.2 30.7,102.1 ; 30.7,102.1 30.7,110.7 ; 30.7,102.1 31.45,102.85 31.55,102.85 ; 30.7,110.7 30.7,117.7 ; 31.55,102.85 D25.6 31.55,102.85
  Bottom Layer w0.25: v1(30.7,75.4) 31.68,76.38 J2.1
LEDS.RED_2: D2.6 D10.6 D18.6 D26.6 D34.6 D42.6 D50.6 D58.6 J2.7 | length 82.9
  Top Layer w0.25: v1(37.1,69.6) 37.2,69.6 37.985,70.385 37.985,75.415 ; 39,103.4 39.55,102.85 ; D58.6 38.55,74.85 37.985,75.415 ; D50.6 39.55,81.85 39,82.4 ; D34.6 39.45,95.85 39,96.3 ; D18.6 39.55,109.85 39,110.4 ; D10.6 39.55,116.85 39,117.423 ; D2.6 39.45,123.85 39,123.4 39,117.423 ; 37.985,75.415 37.985,79.785 39,80.8 39,82.4 ; 39,82.4 39,88.4 ; 39,88.4 39.45,88.85 39.55,88.85 ; 39,88.4 39,96.3 ; 39,96.3 39,110.4 ; 39,110.4 39,117.423 ; 39.55,88.85 D42.6 39.55,88.85 ; 39.55,102.85 D26.6 39.55,102.85
  Bottom Layer w0.25: v1(37.1,69.6) 37.1,71.7 37.97,72.57 J2.7
LEDS.RED_3: D3.6 D11.6 D19.6 D27.6 D35.6 D43.6 D51.6 D59.6 J2.2 | length 70.6
  Top Layer w0.25: D59.6 47.495,76.38 v1(47.38,76.38) 46.7,77.06 46.7,77.5 46.7,82.7 ; D51.6 47.55,81.85 46.7,82.7 ; D43.6 47.55,88.85 46.7,89.7 ; D35.6 47.55,95.85 46.7,96.7 ; D27.6 47.55,102.85 46.7,103.7 ; D19.6 47.55,109.85 46.7,110.7 ; D11.6 47.55,116.85 46.7,117.7 ; D3.6 47.45,123.85 46.7,123.1 46.7,117.7 ; 46.7,82.7 46.7,88.1 46.7,89.7 ; 46.7,89.7 46.7,96.7 ; 46.7,96.7 46.7,103.7 ; 46.7,103.7 46.7,110.7 ; 46.7,110.7 46.7,117.7
  Bottom Layer w0.25: J2.2 v1(47.38,76.38)
LEDS.RED_4: D4.6 D12.6 D20.6 D28.6 D36.6 D44.6 D52.6 D60.6 J2.8 | length 84.6
  Top Layer w0.25: v1(52,69.8) 53,69.8 54.7,71.5 54.7,75.5 ; D60.6 55.35,74.85 54.7,75.5 ; D52.6 55.55,81.85 54.7,82.7 ; D44.6 55.55,88.85 54.7,89.7 ; D36.6 55.55,95.85 54.7,96.7 ; D28.6 55.55,102.85 54.7,103.7 ; D20.6 55.55,109.85 54.7,110.7 ; D12.6 55.55,116.85 54.7,117.7 ; D4.6 55.45,123.85 54.7,123.1 54.7,117.7 ; 54.7,75.5 54.7,82.7 ; 54.7,82.7 54.7,89.7 ; 54.7,89.7 54.7,96.7 ; 54.7,96.7 54.7,103.7 ; 54.7,103.7 54.7,110.7 ; 54.7,110.7 54.7,117.7
  Bottom Layer w0.25: J2.8 46.13,72.57 48.9,69.8 v1(52,69.8)
LEDS.RED_5: D5.6 D13.6 D21.6 D29.6 D37.6 D45.6 D53.6 D61.6 J3.1 | length 80.2
  Top Layer w0.25: D61.6 v1(62.7,74.85) 62.7,82.7 ; D53.6 63.55,81.85 62.7,82.7 ; D45.6 63.55,88.85 62.7,89.7 ; D37.6 63.55,95.85 62.7,96.7 ; D29.6 63.55,102.85 62.7,103.7 ; D21.6 63.55,109.85 62.7,110.7 ; D13.6 63.55,116.85 62.7,117.7 ; D5.6 63.45,123.85 62.7,123.1 62.7,117.7 ; 62.7,82.7 62.7,88.1 62.7,89.7 ; 62.7,89.7 62.7,96.7 ; 62.7,96.7 62.7,103.7 ; 62.7,103.7 62.7,110.7 ; 62.7,110.7 62.7,117.7
  Bottom Layer w0.25: v1(62.7,74.85) 67.15,74.85 68.2,75.9 70.6,75.9 71.14,76.44 J3.1
LEDS.RED_6: D6.6 D14.6 D22.6 D30.6 D38.6 D46.6 D54.6 D62.6 J3.7 | length 74
  Top Layer w0.25: v1(70.7,72.7) 70.7,75.4 ; D62.6 71.25,74.85 70.7,75.4 ; D54.6 71.55,81.85 70.7,82.7 ; D46.6 71.55,88.85 70.7,89.7 ; D38.6 71.55,95.85 70.7,96.7 ; D30.6 71.55,102.85 70.7,103.7 ; D22.6 71.55,109.85 70.7,110.7 ; D14.6 71.55,116.85 70.7,117.7 ; D6.6 71.45,123.85 70.7,123.1 70.7,117.7 ; 70.7,75.4 70.7,82.7 ; 70.7,82.7 70.7,88.1 70.7,89.7 ; 70.7,89.7 70.7,96.7 ; 70.7,96.7 70.7,103.7 ; 70.7,103.7 70.7,110.7 ; 70.7,110.7 70.7,117.7
  Bottom Layer w0.25: v1(70.7,72.7) 72.93,72.7 J3.7
LEDS.RED_7: D7.6 D15.6 D23.6 D31.6 D39.6 D47.6 D55.6 D63.6 J3.2 | length 76.2
  Top Layer w0.25: D55.6 79.55,81.85 78.7,82.7 ; D47.6 79.55,88.85 78.7,89.7 ; D39.6 79.55,95.85 78.7,96.7 ; D31.6 79.55,102.85 78.7,103.7 ; D23.6 79.55,109.85 78.7,110.7 ; D15.6 79.55,116.85 78.7,117.7 ; D7.6 79.45,123.85 78.7,123.1 78.7,117.7 ; v1(81.94,76.44) 81.44,76.44 81.025,76.025 D63.6 79.45,74.85 78.7,75.6 78.7,82.7 ; 78.7,82.7 78.7,89.7 ; 78.7,89.7 78.7,96.7 ; 78.7,96.7 78.7,103.7 ; 78.7,103.7 78.7,110.7 ; 78.7,110.7 78.7,117.7
  Bottom Layer w0.25: J3.2 v1(81.94,76.44)
LEDS.RED_8: D8.6 D16.6 D24.6 D32.6 D40.6 D48.6 D56.6 D64.6 J3.8 | length 85
  Top Layer w0.25: v1(86.7,70.3) 86.7,75.7 ; D64.6 87.55,74.85 86.7,75.7 ; D56.6 87.45,81.85 86.7,81.1 ; D48.6 87.55,88.85 86.7,89.7 ; D40.6 87.55,95.85 86.7,96.7 ; D32.6 87.55,102.85 86.7,103.7 ; D24.6 87.55,109.85 86.7,110.7 ; D16.6 87.55,116.85 86.7,117.7 ; D8.6 87.45,123.85 86.7,123.1 86.7,117.7 ; 86.7,75.7 86.7,81.1 ; 86.7,81.1 86.7,88.1 86.7,89.7 ; 86.7,89.7 86.7,96.7 ; 86.7,96.7 86.7,103.7 ; 86.7,103.7 86.7,110.7 ; 86.7,110.7 86.7,117.7
  Bottom Layer w0.25: J3.8 77.47,72.63 79.8,70.3 v1(86.7,70.3)
NetD1_1: D1.1 D1.2 D1.3 D2.1 D2.2 D2.3 D3.1 D3.2 D3.3 D4.1 D4.2 D4.3 D5.1 D5.2 D5.3 D6.1 D6.2 D6.3 D7.1 D7.2 D7.3 D8.1 D8.2 D8.3 Q1.4 | length 108.6
  Top Layer w0.4: D1.3 D1.2 D1.1 28.775,125.8 36.775,125.8 ; D2.3 D2.2 D2.1 36.775,125.8 ; D3.3 D3.2 D3.1 44.775,124.925 43.9,125.8 ; D4.3 D4.2 D4.1 52.775,124.925 51.9,125.8 ; D5.3 D5.2 D5.1 60.775,125.8 ; v1(68.8,118.5) 68.8,119.925 69,120.125 D6.3 D6.2 D6.1 68.775,125.8 ; D7.3 D7.2 D7.1 76.775,125.8 ; D8.3 D8.2 D8.1 84.775,125.8 76.775,125.8 ; 36.775,125.8 43.9,125.8 ; 43.9,125.8 51.9,125.8 ; 51.9,125.8 60.775,125.8 ; 60.775,125.8 68.775,125.8 ; 68.775,125.8 76.775,125.8
  Bottom Layer w0.4: v1(68.8,118.5) 68.8,115.6 70.25,114.15 Q1.4
NetD9_1: D9.1 D9.2 D9.3 D10.1 D10.2 D10.3 D11.1 D11.2 D11.3 D12.1 D12.2 D12.3 D13.1 D13.2 D13.3 D14.1 D14.2 D14.3 D15.1 D15.2 D15.3 D16.1 D16.2 D16.3 Q2.4 | length 102.3
  Top Layer w0.4: D9.1 D9.2 D9.3 28.775,112.325 v1(29.5,111.6) ; D10.1 D10.2 D10.3 36.8,113.325 v1(36.8,111.6) ; D11.1 D11.3 44.7,113.275 44.8,113.175 v1(44.8,111.6) ; v1(52.775,111.625) D12.1 ; v1(60.775,111.625) D13.3 D13.2 D13.1 ; D13.3@60.8,113.2 D13.3@61,112.975 ; v1(68.775,111.625) D14.1 ; v1(76.775,111.625) D15.3 D15.2 D15.1 ; v1(84.775,111.725) D16.3 D16.2 D16.1
  Bottom Layer w0.4: v1(29.5,111.6) v1(36.8,111.6) ; Q2.4 38.05,114.15 36.8,112.9 v1(36.8,111.6) ; v1(84.775,111.725) v1(76.775,111.625) v1(68.775,111.625) 68.65,111.6 60.8,111.6 v1(60.775,111.625) v1(52.775,111.625) 52.74,111.66 44.86,111.66 v1(44.8,111.6) v1(36.8,111.6)
NetD17_1: D17.1 D17.2 D17.3 D18.1 D18.2 D18.3 D19.1 D19.2 D19.3 D20.1 D20.2 D20.3 D21.1 D21.2 D21.3 D22.1 D22.2 D22.3 D23.1 D23.2 D23.3 D24.1 D24.2 D24.3 Q3.4 | length 104.5
  Top Layer w0.4: D17.1 D17.2 D17.3 28.775,105.325 v1(29.5,104.6) ; D18.1 D18.2 D18.3 36.8,106.325 v1(36.8,104.6) ; D19.1 D19.3 44.7,106.275 44.8,106.175 v1(44.8,104.6) ; v1(52.775,104.625) D20.3 D20.2 D20.1 ; v1(60.775,104.625) D21.3 D21.2 D21.1 ; D21.3@60.8,106.2 D21.3@61,105.975 ; v1(68.775,104.625) D22.1 ; v1(76.775,104.625) D23.3 D23.2 D23.1 ; v1(84.775,104.725) D24.3 D24.2 D24.1
  Bottom Layer w0.4: v1(29.5,104.6) 29.56,104.66 36.74,104.66 v1(36.8,104.6) v1(44.8,104.6) 44.825,104.625 v1(52.775,104.625) v1(60.775,104.625) 60.8,104.6 68.65,104.6 v1(68.775,104.625) ; Q3.4 69.75,100.15 68.775,101.125 v1(68.775,104.625) ; v1(84.775,104.725) v1(76.775,104.625) v1(68.775,104.625)
NetD25_1: D25.1 D25.2 D25.3 D26.1 D26.2 D26.3 D27.1 D27.2 D27.3 D28.1 D28.2 D28.3 D29.1 D29.2 D29.3 D30.1 D30.2 D30.3 D31.1 D31.2 D31.3 D32.1 D32.2 D32.3 Q4.4 | length 105.2
  Top Layer w0.4: D25.1 D25.2 D25.3 28.775,98.325 v1(29.5,97.6) ; v1(35.9,104) 36.775,103.125 D26.1 D26.2 D26.3 36.8,99.325 v1(36.8,97.6) ; D27.1 D27.3 44.7,99.275 44.8,99.175 v1(44.8,97.6) ; v1(52.775,97.625) D28.3 D28.2 D28.1 ; v1(60.775,97.625) D29.3 D29.2 D29.1 ; D29.3@60.8,99.2 D29.3@61,98.975 ; v1(68.775,97.625) D30.1 ; v1(76.775,97.625) D31.3 D31.2 D31.1 ; v1(84.675,97.625) 84.675,99.25 D32.3 D32.2 D32.1
  Bottom Layer w0.4: v1(29.5,97.6) v1(36.8,97.6) v1(44.8,97.6) 44.825,97.625 v1(52.775,97.625) v1(60.775,97.625) 60.8,97.6 68.65,97.6 v1(68.775,97.625) 68.82,97.58 76.73,97.58 v1(76.775,97.625) v1(84.675,97.625) ; v1(35.9,104) 35.9,102.808 38.558,100.15 Q4.4
NetD33_1: D33.1 D33.2 D33.3 D34.1 D34.2 D34.3 D35.1 D35.2 D35.3 D36.1 D36.2 D36.3 D37.1 D37.2 D37.3 D38.1 D38.2 D38.3 D39.1 D39.2 D39.3 D40.1 D40.2 D40.3 Q5.4 | length 102.9
  Top Layer w0.4: D33.1 D33.2 D33.3 28.775,91.325 v1(29.5,90.6) ; D34.1 D34.2 D34.3 36.8,92.325 v1(36.8,90.6) ; D35.1 D35.3 44.7,92.275 44.8,92.175 v1(44.8,90.6) ; v1(52.775,90.625) D36.3 D36.2 D36.1 ; v1(60.775,90.625) D37.3 D37.2 D37.1 ; D37.3@60.8,92.2 D37.3@61,91.975 ; v1(68.775,90.625) D38.1 ; v1(76.775,90.625) D39.3 D39.2 D39.1 ; D40.1 D40.2 D40.3 84.775,90.525 84.8,90.55 v1(84.8,90.6)
  Bottom Layer w0.25: v1@68.65,90.6 68.8,90.75 68.8,92.2 69.75,93.15 Q5.4
  Bottom Layer w0.4: v1(29.5,90.6) v1(36.8,90.6) v1(44.8,90.6) 44.825,90.625 v1(52.775,90.625) v1(60.775,90.625) 60.8,90.6 68.65,90.6 v1(68.775,90.625) v1(76.775,90.625) ; v1@76.775,90.6 v1(84.8,90.6)
NetD41_1: D41.1 D41.2 D41.3 D42.1 D42.2 D42.3 D43.1 D43.2 D43.3 D44.1 D44.2 D44.3 D45.1 D45.2 D45.3 D46.1 D46.2 D46.3 D47.1 D47.2 D47.3 D48.1 D48.2 D48.3 Q6.4 | length 113.7
  Top Layer w0.4: v1(27.5,90.9) 28.775,89.625 D41.1 D41.2 D41.3 28.775,84.325 v1(29.5,83.6) ; D42.1 D42.2 D42.3 36.8,85.325 v1(36.8,83.6) ; D43.1 D43.2 D43.3 44.7,85.275 44.8,85.175 v1(44.8,83.6) ; v1(52.775,83.625) D44.3 D44.2 D44.1 ; v1(60.775,83.625) D45.3 D45.2 D45.1 ; D45.3@60.8,85.2 D45.3@61,84.975 ; v1(68.775,83.625) D46.3 D46.2 D46.1 ; v1(76.775,83.625) D47.3 D47.2 D47.1 ; v1(84.775,83.725) D48.3 D48.2 D48.1
  Bottom Layer w0.4: v1(27.5,90.9) 29.75,93.15 Q6.4 ; v1(29.5,83.6) v1(36.8,83.6) v1(44.8,83.6) 44.825,83.625 v1(52.775,83.625) v1(60.775,83.625) 60.8,83.6 68.65,83.6 v1(68.775,83.625) 69.4,83 76.15,83 v1(76.775,83.625) v1(84.775,83.725)
NetD49_1: D49.1 D49.2 D49.3 D50.1 D50.2 D50.3 D51.1 D51.2 D51.3 D52.1 D52.2 D52.3 D53.1 D53.2 D53.3 D54.1 D54.2 D54.3 D55.1 D55.2 D55.3 D56.1 D56.2 D56.3 Q7.4 | length 103.6
  Top Layer w0.4: D49.1 D49.2 D49.3 28.775,77.025 v1(29.2,76.6) ; D50.1 D50.2 D50.3 36.775,77.025 v1(36.8,77) ; D51.1 D51.2 D51.3 45.15,78.35 v1(46,77.5) ; v1(52.7,76.9) 52.775,76.975 D52.3 D52.2 D52.1 ; D53.1 D53.2 D53.3 60.8,78.325 v1(60.8,76.9) ; v1(68.8,76.9) 68.8,78.325 D54.3 D54.2 D54.1 68.775,82.475 v1(70,83.7) ; D55.1 D55.2 D55.3 77.25,78.35 v1(78.1,77.5) ; D56.1 D56.2 D56.3 84.8,78.325 v1(84.8,76.7)
  Bottom Layer w0.4: v1(29.2,76.6) 29.6,77 v1(36.8,77) 37.9,77 38.4,77.5 v1(46,77.5) 52.1,77.5 v1(52.7,76.9) v1(60.8,76.9) v1(68.8,76.9) 69.8,76.9 70.4,77.5 v1(78.1,77.5) 84,77.5 v1(84.8,76.7) ; v1(70,83.7) 70,85.7 70.6,86.3 Q7.4
NetD57_1: D57.1 D57.2 D57.3 D58.1 D58.2 D58.3 D59.1 D59.2 D59.3 D60.1 D60.2 D60.3 D61.1 D61.2 D61.3 D62.1 D62.2 D62.3 D63.1 D63.2 D63.3 D64.1 D64.2 D64.3 Q8.4 | length 147.6
  Top Layer w0.4: D57.1 D57.2 D57.3 v1@31.912,68.213 ; v1@31.925,68.2 33.625,68.2 ; D58.1 D58.2 D58.3 33.625,68.2 ; D59.1 D59.2 D59.3 44.775,69.875 43.1,68.2 ; D60.1 D60.2 D60.3 51.25,71.35 48.1,68.2 ; D61.1 D61.2 D61.3 59.45,71.35 56.3,68.2 ; D62.1 D62.2 D62.3 67.55,71.35 64.4,68.2 ; D63.1 D63.2 D63.3 75.35,71.35 72.2,68.2 ; D64.1 D64.2 D64.3 81.625,68.2 72.2,68.2 ; 33.625,68.2 43.1,68.2 ; 43.1,68.2 48.1,68.2 ; 48.1,68.2 56.3,68.2 ; 56.3,68.2 64.4,68.2 ; 64.4,68.2 72.2,68.2
  Bottom Layer w0.4: v1(31.9,68.2) 28.1,72 28.1,83.7 29.4,85 37.2,85 38.35,86.15 Q8.4
NetQ1_3: Q1.3 Q1.6 R1.1 | length 11.3
  Bottom Layer w0.4: Q1.6 72.45,116.05 72.85,115.65 72.85,114.45 73.15,114.15 Q1.3 77.65,114.15 78.4,113.4 R1.1
NetQ2_3: Q2.3 Q2.6 R2.1 | length 11.3
  Bottom Layer w0.4: Q2.6@39.4,116.1 Q2.6 40.45,116.05 40.9,115.6 40.9,114.5 41.25,114.15 Q2.3 44.85,114.15 45.5,113.5 R2.1
NetQ3_3: Q3.3 Q3.6 R3.1 | length 11.2
  Bottom Layer w0.4: Q3.6@71.55,102.1 71.6,102.05 72.3,102.05 72.9,101.45 72.9,100.45 73.15,100.2 77.5,100.2 78.3,99.4 R3.1
NetQ4_3: Q4.3 Q4.6 R4.1 | length 11.4
  Bottom Layer w0.4: Q4.6 40.65,102.05 40.9,101.8 40.9,100.4 41.15,100.15 Q4.3 45.55,100.15 46.2,99.5 R4.1
NetQ5_3: Q5.3 Q5.6 R5.1 | length 11.1
  Bottom Layer w0.4: Q5.6 72.45,95.05 73,94.5 73,93.6 73.45,93.15 Q5.3 77.45,93.15 78.2,92.4 R5.1
NetQ6_3: Q6.3 Q6.6 R6.1 | length 11.3
  Bottom Layer w0.4: Q6.6 40.55,95.05 41,94.6 41,93.5 41.35,93.15 Q6.3 45.85,93.15 46.5,92.5 R6.1
NetQ7_3: Q7.3 Q7.6 R7.1 | length 11.3
  Bottom Layer w0.4: Q7.6 72.6,88.2 72.9,87.9 72.9,86.7 73.3,86.3 Q7.3 77.1,86.3 78,85.4 R7.1
NetQ8_3: Q8.3 Q8.6 R8.1 | length 11.1
  Bottom Layer w0.4: Q8.6 40.45,88.05 40.9,87.6 40.9,86.7 41.45,86.15 Q8.3 46.05,86.15 46.7,85.5 R8.1
ROWS.ROW_1: J1.1 Q1.1 | length 16.8
  Bottom Layer w0.4: J1.1 63.2,119.53 63.77,120.1 72.6,120.1 74.2,118.5 Q1.1
ROWS.ROW_2: J1.2 Q2.1 | length 16.2
  Bottom Layer w0.4: Q2.1 44.95,116.05 48.43,119.53 J1.2
ROWS.ROW_3: J1.3 Q3.1 | length 54.9
  Bottom Layer w0.4: J1.3 84.9,120.8 87.2,118.5 87.2,105.5 83.75,102.05 Q3.1
ROWS.ROW_4: J1.4 Q4.1 | length 88.5
  Bottom Layer w0.4: Q4.1 43.65,103.6 51.9,103.6 52.8,102.7 52.8,99 52.1,98.3 31.4,98.3 27.92,101.78 27.92,118.22 30.5,120.8 J1.4
ROWS.ROW_5: J1.5 Q5.1 | length 66.1
  Bottom Layer w0.4: J1.5 85.73,122.07 89,118.8 89,98.6 85.45,95.05 Q5.1
ROWS.ROW_6: J1.6 Q6.1 | length 102.5
  Bottom Layer w0.4: Q6.1 43.95,96.9 52,96.9 52.7,96.2 52.7,92.2 52.1,91.6 29.567,91.6 28.84,90.873 28.84,90.84 27.9,89.9 27.1,89.9 26.8,90.2 26.8,91.6 27.46,92.26 27.46,93.673 27.36,93.773 27.36,118.96 30.47,122.07 J1.6
ROWS.ROW_7: J1.7 Q7.1 | length 77.1
  Bottom Layer w0.4: J1.7 86.66,123.34 90.7,119.3 90.7,91.9 87,88.2 Q7.1
ROWS.ROW_8: J1.8 Q8.1 | length 108.9
  Top Layer w0.4: v1(26.8,87.8) v1(26.8,93.4) ; v1(34.4,84.3) 34.5,84.4 v1(34.5,85.9)
  Bottom Layer w0.4: v1(26.8,87.8) 27.3,87.3 33.1,87.3 v1(34.5,85.9) ; v1(26.8,93.4) 26.8,120.2 29.94,123.34 J1.8 ; v1(34.4,84.3) 34.7,84.3 52.3,84.3 53.2,85.2 53.2,88.6 51.86,89.94 43.99,89.94 Q8.1
VCC: J1.10 Q1.2 Q2.2 Q3.2 Q4.2 Q5.2 Q6.2 Q7.2 Q8.2 R1.2 R2.2 R3.2 R4.2 R5.2 R6.2 R7.2 R8.2 | length 184.3
  Top Layer w0.4: v1(50.4,105.5) 50.4,104.4 50.9,103.9 v1(50.9,102.5) ; v1(50.8,110.9) v1(50.8,112.5) ; v1(50.9,89.2) v1@50.9,92.1 ; v1(50.9,96.1) v1(50.9,99.6) ; v1(51.11,124.61) 51.11,119.69 v1(52.3,118.5) ; v1(82.8,87) v1(82.8,91.5) ; v1(82.8,93.2) 83.015,93.415 83.015,98.285 v1(82.8,98.5) ; v1(82.8,100.2) v1(82.8,105.4)
  Bottom Layer w0.4: Q8.2 50.2,87.1 50.9,87.8 v1(50.9,89.2) ; Q6.2 R6.2 50.4,94.1 50.9,94.6 ; Q4.2 R4.2 50.4,101.1 50.9,100.6 ; Q2.2 51.2,115.1 52.3,116.2 ; v1(50.4,105.5) 50.4,110.5 v1(50.8,110.9) ; v1(50.8,112.5) 52.3,114 ; v1(50.9,92.3) 50.9,94.6 ; v1(50.9,96.1) 50.9,94.6 ; v1(50.9,99.6) 50.9,100.6 ; v1(50.9,102.5) 50.9,100.6 ; v1(51.11,124.61) J1.10 ; v1(52.3,118.5) 52.3,116.2 ; Q7.2 80.75,87.25 R7.2 v1(82.8,87) ; Q5.2 81.9,94.1 v1(82.8,93.2) v1(82.8,91.5) ; Q3.2 81.9,101.1 v1(82.8,100.2) v1(82.8,98.5) ; Q1.2 82.5,115.1 ; v1(82.8,105.4) 86.5,109.1 86.5,114.6 86,115.1 82.5,115.1 ; 52.3,114 68.2,114 69.7,112.5 82.6,112.5 83.4,113.3 83.4,114.2 82.5,115.1 ; 52.3,114 52.3,116.2